# Altium PCB Carte_Batterie 2023.PcbDoc
Units mm, origin at the board's own origin, x right, y up, seen from the top; angles counter-clockwise.
Board outline 46 x 31 mm, 2 copper layers (Component Side, Solder Side), stack 1.57 mm thick; 89 components, 57 nets, 247 pads, 0 vias.
Unrouted connection lines stored in the file: 165.
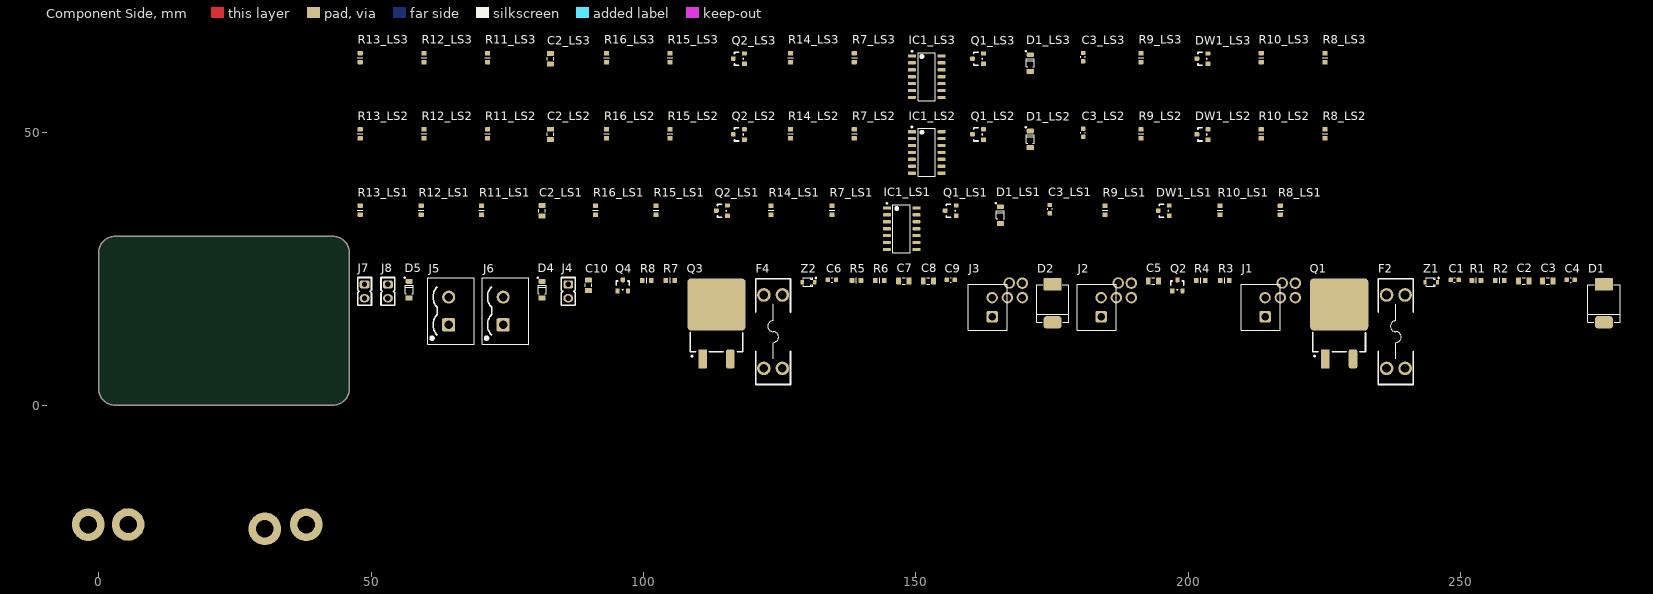
[diagram p0: Component Side view]
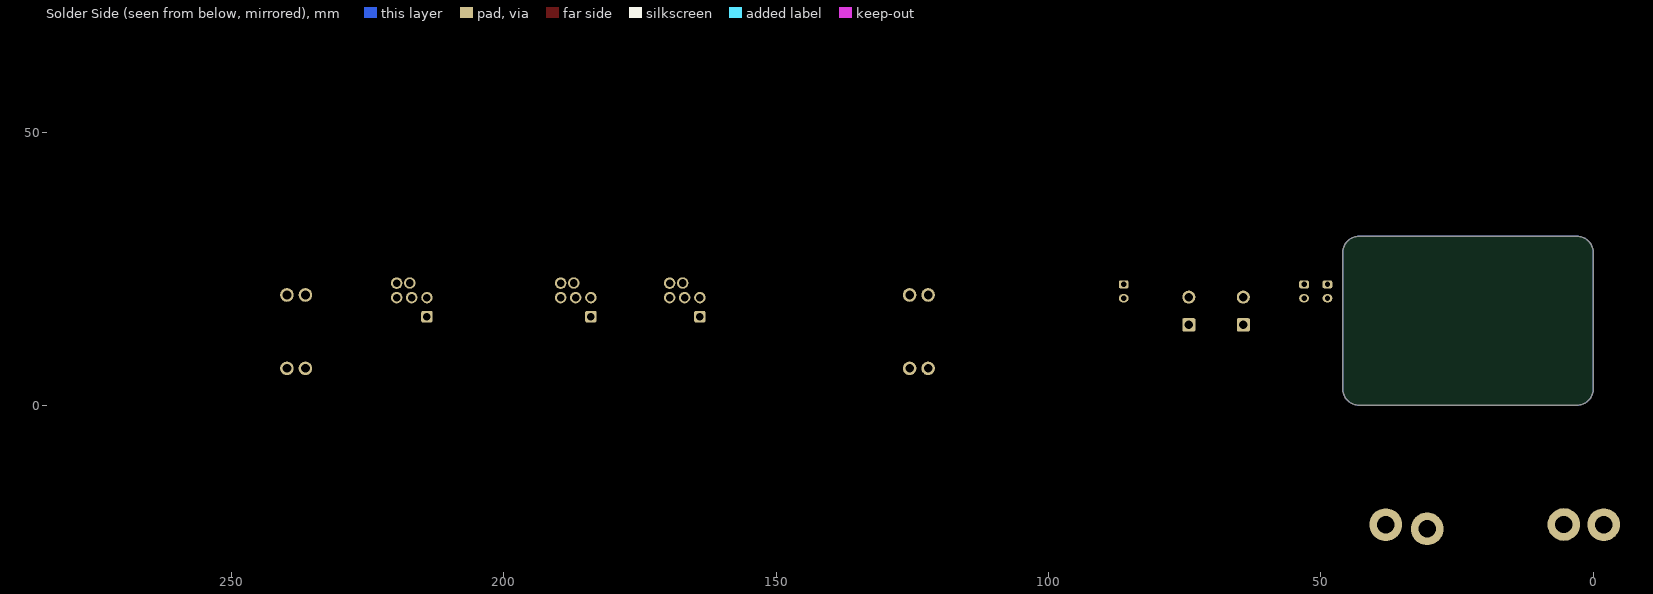
[diagram p1: Solder Side view, seen from below]

## Layer stack, top to bottom
Top Solder: solder mask 0.01, Solder Resist, Dk 3.5
Component Side: signal copper 0.035
Dielectric 1: core 1.5, FR-4, Dk 4.8
Solder Side: signal copper 0.035
Bottom Solder: solder mask 0.01, Solder Resist, Dk 3.5

## Board outline
0,3 0,28 cw(c3,28) 3,31 43,31 cw(c43,28) 46,28 46,3 cw(c43,3) 43,0 3,0 cw(c3,3)

## Design rules (kind name [scope] priority, off if disabled: settings)
AssemblyTestPointUsage [All] p1 off:
AssemblyTestpoint [All] p1 off: testpointundercomponent=TRUE minsize=1.016 maxsize=2.54 preferedsize=1.524 minholesize=0 maxholesize=1.016 preferedholesize=0.813 testpointgrid=0.025 usegrid=TRUE gridtolerance=0 allowsidetop=TRUE allowsidebottom=TRUE
BoardOutlineClearance [All] p1: gap=0.4 ignorepadtopadclearanceinfootprint=FALSE
Clearance Clearance_polygon [InPolygon] p1: gap=0.2 ignorepadtopadclearanceinfootprint=FALSE except(0: Arc-Hole Track-Hole SMDPad-Hole THPad-Hole Via-Hole Fill-Hole Poly-Hole Region-Hole Text-Hole)
Clearance Clearance_for_power_net [InNetClass('Power') vs InNet('GND')] p2: gap=0.2 ignorepadtopadclearanceinfootprint=TRUE except(0: Arc-Hole Track-Hole SMDPad-Hole THPad-Hole Via-Hole Fill-Hole Poly-Hole Region-Hole Text-Hole)
Clearance Clearance_general [All] p3: gap=0.15 ignorepadtopadclearanceinfootprint=FALSE
ComponentClearance [All] p1: gap=0 collisioncheckmode=3 verticalgap=0 showdistances=FALSE
DiffPairsRouting [All] p1 off: maxlimit=0.254 minlimit=0.127 mostfreqgap=0.254 toplayer_minwidth=0.381 toplayer_maxwidth=0.381 toplayer_prefwidth=0.381 bottomlayer_minwidth=0.381 bottomlayer_maxwidth=0.381 bottomlayer_prefwidth=0.381 maxuncoupledlength=12.7
FabricationTestPointUsage TestPointUsage [All] p1 off: valid=0 allowmultiple=FALSE
FabricationTestpoint Testpoint [All] p1 off: side=3 testpointundercomponent=TRUE minsize=1.016 maxsize=2.54 preferedsize=1.524 minholesize=0 maxholesize=1.016 preferedholesize=0.813 testpointgrid=0.025 allowsidetop=TRUE allowsidebottom=TRUE usegrid=TRUE gridtolerance=0
FanoutControl Fanout_BGA [IsBGA] p1 off: bgadir=Out bgaviamode=Centered fanoutstyle=Auto fanoutdirection=Alternating viagrid=0.025 // Fanout_BGA (Default Rule)
FanoutControl Fanout_LCC [IsLCC] p2 off: bgadir=Out bgaviamode=Centered fanoutstyle=Auto fanoutdirection=Alternating viagrid=0.025 // Fanout_LCC (Default Rule)
FanoutControl Fanout_SOIC [IsSOIC] p3 off: bgadir=Out bgaviamode=Centered fanoutstyle=Auto fanoutdirection=Alternating viagrid=0.025 // Fanout_SOIC (Default Rule)
FanoutControl Fanout_Small [(CompPinCount < 5)] p4 off: bgadir=Out bgaviamode=Centered fanoutstyle=Auto fanoutdirection=OutThenIn viagrid=0.025 // Fanout_Small (Default Rule)
FanoutControl Fanout_Default [All] p5 off: bgadir=Out bgaviamode=Centered fanoutstyle=Auto fanoutdirection=Alternating viagrid=0.025 // Fanout_Default (Default Rule)
Height [All] p1: minheight=0 maxheight=50 prefheight=10
HoleSize [All] p1: absolutevalues=TRUE maxlimit=6.3 minlimit=0.2 maxpercent=80.000 minpercent=20.000
HoleToHoleClearance [All] p1: gap=0.4 allowstackedmicrovias=TRUE
MinimumAnnularRing [All] p1: minimumring=0.076
MinimumSolderMaskSliver [All] p1: minsoldermaskwidth=0.15
MinimumSolderMaskSliver SilkscreenOverComponentPads [All] p2 off: minsoldermaskwidth=0.254
NetAntennae [All] p1 off: netantennaetolerance=0
PlaneClearance [All] p1: clearance=0.5
PlaneConnect [All] p1: planeconnectstyle=Relief reliefexpansion=0.4 reliefentries=4 reliefconductorwidth=0.3 reliefairgap=0.2
PolygonConnect [All] p1: thpad.connectstyle=Relief thpad.reliefconductorwidth=0.25 thpad.reliefentries=4 thpad.polygonreliefangle="90 Angle" thpad.airgapwidth=0.254 smdpad.connectstyle=Relief smdpad.reliefconductorwidth=0.25 smdpad.reliefentries=4 smdpad.polygonreliefangle="90 Angle" smdpad.airgapwidth=0.254 via.connectstyle=Direct via.reliefconductorwidth=0.25 via.reliefentries=4 via.polygonreliefangle="90 Angle" via.airgapwidth=0.254
PolygonConnect PolygonConnect_Via_GND [All vs (InNet('GND') AND  IsVia)] p2: thpad.connectstyle=Relief thpad.reliefconductorwidth=0.25 thpad.reliefentries=4 thpad.polygonreliefangle="90 Angle" thpad.airgapwidth=0.254 smdpad.connectstyle=Relief smdpad.reliefconductorwidth=0.25 smdpad.reliefentries=4 smdpad.polygonreliefangle="90 Angle" smdpad.airgapwidth=0.254 via.connectstyle=Direct via.reliefconductorwidth=0.25 via.reliefentries=4 via.polygonreliefangle="90 Angle" via.airgapwidth=0.254
PolygonConnect PolygonConnect_Via_Power [(InNetClass('Power')  AND  IsVia)] p3: connectstyle=Relief reliefconductorwidth=0.25 reliefentries=4 polygonreliefangle="90 Angle" airgapwidth=0.254
RoomDefinition LS3 [InComponentClass('LS3')] p1: confinementstyle=ConfineIn formatcopy=TRUE lockcomponents=FALSE outline 47.096,55.5 233.696,55.5 233.696,68.3 47.096,68.3
RoomDefinition LS2 [InComponentClass('LS2')] p2: confinementstyle=ConfineIn formatcopy=TRUE lockcomponents=FALSE outline 47.096,41.6 233.696,41.6 233.696,54.3 47.096,54.3
RoomDefinition LS1 [InComponentClass('LS1')] p3: confinementstyle=ConfineIn formatcopy=TRUE lockcomponents=FALSE outline 47.096,27.6 224.996,27.6 224.996,40.3 47.096,40.3
RoomDefinition "Carte_Batterie 2023" [InComponentClass('Carte_Batterie 2023')] p4: confinementstyle=ConfineIn formatcopy=TRUE lockcomponents=FALSE outline 47.196,1.5 279.595,1.5 279.595,26.3 47.196,26.3
RoutingCorners [All] p1: cornerstyle=45-Degree minsetback=1.5 maxsetback=2.54
RoutingVias [All] p1: holewidth=0.3 width=0.7 viastyle="Through Hole" minholewidth=0.3 minwidth=0.7 maxholewidth=0.3 maxwidth=1
SilkToSilkClearance [All] p1 off: silktosilkclearance=0.1
SolderMaskExpansion [All] p1: expansion=0.075 istentingtop=FALSE
Width [All] p1: maxlimit=15 minlimit=0.127 preferedwidth=0.2
10 further rules are at their usual default settings.

## Classes and differential pairs
channel class Lipo_Saver_Buzzer_only: LS1 LS2 LS3
net class PWR_35A: Batt12_P3 VBATT12 VBATT12_F
net class PWR_20A: Batt24_P3 Batt24_P6 VBATT24 VBATT24_F
component class LS3: C2_LS3 C3_LS3 D1_LS3 DW1_LS3 IC1_LS3 Q1_LS3 Q2_LS3 R7_LS3 R8_LS3 R9_LS3 R10_LS3 R11_LS3 R12_LS3 R13_LS3 R14_LS3 R15_LS3 R16_LS3 SPK1_LS3
component class LS2: C2_LS2 C3_LS2 D1_LS2 DW1_LS2 IC1_LS2 Q1_LS2 Q2_LS2 R7_LS2 R8_LS2 R9_LS2 R10_LS2 R11_LS2 R12_LS2 R13_LS2 R14_LS2 R15_LS2 R16_LS2 SPK1_LS2
component class LS1: C2_LS1 C3_LS1 D1_LS1 DW1_LS1 IC1_LS1 Q1_LS1 Q2_LS1 R7_LS1 R8_LS1 R9_LS1 R10_LS1 R11_LS1 R12_LS1 R13_LS1 R14_LS1 R15_LS1 R16_LS1 SPK1_LS1
component class "Carte_Batterie 2023": C1 C2 C3 C4 C5 C6 C7 C8 C9 C10 D1 D2 D4 D5 F1 F2 F3 F4 J1 J2 J3 J4 J5 J6 J7 J8 Q1 Q2 Q3 Q4 R1 R2 R3 R4 R5 R6 R7 R8 Z1 Z2

## Components (designator, comment, footprint, x,y, rotation, side; value= is the part's Value field where it differs from the comment)
C1 "100nF" "WCAP-CSGP_0603, 1.6x0.8x0.8" 248.896,23 r0 top
C2 "1uF" "WCAP-CSGP_0805, 2x1.25x1.25" 261.596,22.8 r0 top
C2_LS1 "recup_C2" "WCAP-CSGP_0805, 2x1.25x1.25" 81.396,35.7 r90 top value=10uF (schematic designator C2)
C2_LS2 "recup_C2" "WCAP-CSGP_0805, 2x1.25x1.25" 82.896,49.7 r90 top value=10uF (schematic designator C2)
C2_LS3 "recup_C2" "WCAP-CSGP_0805, 2x1.25x1.25" 82.896,63.6 r90 top value=10uF (schematic designator C2)
C3 "1uF" "WCAP-CSGP_0805, 2x1.25x1.25" 265.996,22.8 r0 top
C3_LS1 "recup_C3" "WCAP-CSGP_0603, 1.6x0.8x0.8" 174.596,36 r90 top value=10nF (schematic designator C3)
C3_LS2 "recup_C3" "WCAP-CSGP_0603, 1.6x0.8x0.8" 180.696,50 r90 top value=10nF (schematic designator C3)
C3_LS3 "recup_C3" "WCAP-CSGP_0603, 1.6x0.8x0.8" 180.696,63.9 r90 top value=10nF (schematic designator C3)
C4 "100nF" "WCAP-CSGP_0603, 1.6x0.8x0.8" 270.195,23 r0 top
C5 "10uF" "WCAP-CSGP_0805, 2x1.25x1.25" 193.596,22.8 r0 top
C6 "100nF" "WCAP-CSGP_0603, 1.6x0.8x0.8" 134.596,23 r0 top
C7 "1uF" "WCAP-CSGP_0805, 2x1.25x1.25" 147.796,22.8 r0 top
C8 "1uF" "WCAP-CSGP_0805, 2x1.25x1.25" 152.296,22.8 r0 top
C9 "100nF" "WCAP-CSGP_0603, 1.6x0.8x0.8" 156.396,23 r0 top
C10 "10uF" "WCAP-CSGP_0805, 2x1.25x1.25" 89.896,22 r90 top
D1 "RS3J R6" "SMC, DO-214AB" 276.295,18.7 r90 top value=600V
D1_LS1 "recup_D1" SOD-123FL 165.496,34.9 r90 top value=40V (schematic designator D1)
D1_LS2 "recup_D1" SOD-123FL 170.996,48.8 r90 top value=40V (schematic designator D1)
D1_LS3 "recup_D1" SOD-123FL 170.996,62.8 r90 top value=40V (schematic designator D1)
D2 "RS3J R6" "SMC, DO-214AB" 175.096,18.7 r90 top value=600V
D4 "RBR3MM40ATFTR" SOD-123FL 81.396,21.2 r90 top value=40V
D5 "RBR3MM40ATFTR" SOD-123FL 56.996,21.2 r90 top value=40V
DW1_LS1 "recup_DW1" SOT-23 195.496,35.7 r90 top (schematic designator DW1)
DW1_LS2 "recup_DW1" SOT-23 202.596,49.7 r90 top (schematic designator DW1)
DW1_LS3 "recup_DW1" SOT-23 202.596,63.6 r90 top (schematic designator DW1)
F2 "3557-2" 3557-2 238.096,13.5 r90 top value=na
F4 "3557-2" 3557-2 123.796,13.5 r90 top value=na
IC1_LS1 "ASIC_LipoSaver" SOIC127P600X175-14N 147.396,32.4 r0 top (schematic designator IC1)
IC1_LS2 "ASIC_LipoSaver" SOIC127P600X175-14N 151.996,46.4 r0 top (schematic designator IC1)
IC1_LS3 "ASIC_LipoSaver" SOIC127P600X175-14N 151.996,60.3 r0 top (schematic designator IC1)
J1 "custom connector" CONN_BATT-M12 213.296,18 r90 top
J2 "custom connector" CONN_BATT-M12 183.196,18 r90 top
J3 "custom connector" CONN_BATT-M12 163.196,18 r90 top
J4 "22-03-2021" Conn_22-03-2021 86.196,20.9 r90 top
J5 "691311500102" 691311500102 64.696,17.3 r90 top value=2
J6 "691311500102" 691311500102 74.696,17.3 r90 top value=2
J7 "22-03-2021" Conn_22-03-2021 48.796,20.9 r90 top
J8 "22-03-2021" Conn_22-03-2021 53.096,20.9 r90 top
Q1 "SQM120P06-07L_GE3" "TO263AB, D2PAK" 227.696,13.5 r0 top
Q1_LS1 "recup_T1" SOT-23 156.396,35.7 r90 top (schematic designator Q1)
Q1_LS2 "recup_T1" SOT-23 161.396,49.7 r90 top (schematic designator Q1)
Q1_LS3 "recup_T1" SOT-23 161.396,63.6 r90 top (schematic designator Q1)
Q2 "2N7002" SOT-23 197.996,22 r0 top
Q2_LS1 "recup_T2" SOT-23 114.396,35.7 r90 top (schematic designator Q2)
Q2_LS2 "recup_T2" SOT-23 117.496,49.7 r90 top (schematic designator Q2)
Q2_LS3 "recup_T2" SOT-23 117.496,63.6 r90 top (schematic designator Q2)
Q3 "SQM120P06-07L_GE3" "TO263AB, D2PAK" 113.396,13.5 r0 top
Q4 "2N7002" SOT-23 96.196,22 r0 top
R1 "RC0603FR-0710KL" RESC1608X06N 252.896,22.9 r0 top value=10k
R2 "RC0603FR-07100KL" RESC1608X06N 257.196,22.9 r0 top value=100k
R3 "RC0603FR-07100KL" RESC1608X06N 206.696,22.9 r0 top value=100k
R4 "RC0603FR-071K8L" RESC1608X06N 202.296,22.9 r0 top value=1.8k
R5 "RC0603FR-07100KL" RESC1608X06N 139.096,22.9 r0 top value=100k
R6 "RC0603FR-07100KL" RESC1608X06N 143.396,22.9 r0 top value=100k
R7 "RC0603FR-0710KL" RESC1608X06N 104.896,22.9 r0 top value=10k
R7_LS1 "RC0603FR-07100KL" RESC1608X06N 134.596,35.8 r90 top value=510 (schematic designator R7)
R7_LS2 "RC0603FR-07100KL" RESC1608X06N 138.696,49.8 r90 top value=510 (schematic designator R7)
R7_LS3 "RC0603FR-07100KL" RESC1608X06N 138.696,63.8 r90 top value=510 (schematic designator R7)
R8 "RC0603FR-07100KL" RESC1608X06N 100.596,22.9 r0 top value=100k
R8_LS1 "RC0603FR-07100KL" RESC1608X06N 216.896,35.8 r90 top value=1.5k (schematic designator R8)
R8_LS2 "RC0603FR-07100KL" RESC1608X06N 225.096,49.8 r90 top value=1.5k (schematic designator R8)
R8_LS3 "RC0603FR-07100KL" RESC1608X06N 225.096,63.8 r90 top value=1.5k (schematic designator R8)
R9_LS1 "RC0603FR-07100KL" RESC1608X06N 184.696,35.8 r90 top value=12k (schematic designator R9)
R9_LS2 "RC0603FR-07100KL" RESC1608X06N 191.296,49.8 r90 top value=12k (schematic designator R9)
R9_LS3 "RC0603FR-07100KL" RESC1608X06N 191.296,63.8 r90 top value=12k (schematic designator R9)
R10_LS1 "RC0603FR-07100KL" RESC1608X06N 205.796,35.8 r90 top value=12k (schematic designator R10)
R10_LS2 "RC0603FR-07100KL" RESC1608X06N 213.396,49.8 r90 top value=12k (schematic designator R10)
R10_LS3 "RC0603FR-07100KL" RESC1608X06N 213.396,63.8 r90 top value=12k (schematic designator R10)
R11_LS1 "RC0603FR-07100KL" RESC1608X06N 70.296,35.8 r90 top value=12k (schematic designator R11)
R11_LS2 "RC0603FR-07100KL" RESC1608X06N 71.396,49.8 r90 top value=12k (schematic designator R11)
R11_LS3 "RC0603FR-07100KL" RESC1608X06N 71.396,63.8 r90 top value=12k (schematic designator R11)
R12_LS1 "RC0603FR-07100KL" RESC1608X06N 59.196,35.8 r90 top value=12k (schematic designator R12)
R12_LS2 "RC0603FR-07100KL" RESC1608X06N 59.696,49.8 r90 top value=12k (schematic designator R12)
R12_LS3 "RC0603FR-07100KL" RESC1608X06N 59.696,63.8 r90 top value=12k (schematic designator R12)
R13_LS1 "RC0603FR-07100KL" RESC1608X06N 47.996,35.8 r90 top value=12k (schematic designator R13)
R13_LS2 "RC0603FR-07100KL" RESC1608X06N 47.996,49.8 r90 top value=12k (schematic designator R13)
R13_LS3 "RC0603FR-07100KL" RESC1608X06N 47.996,63.8 r90 top value=12k (schematic designator R13)
R14_LS1 "RC0603FR-07100KL" RESC1608X06N 123.396,35.8 r90 top value=24k (schematic designator R14)
R14_LS2 "RC0603FR-07100KL" RESC1608X06N 126.996,49.8 r90 top value=24k (schematic designator R14)
R14_LS3 "RC0603FR-07100KL" RESC1608X06N 126.996,63.8 r90 top value=24k (schematic designator R14)
R15_LS1 "RC0603FR-07100KL" RESC1608X06N 102.296,35.8 r90 top value=24k (schematic designator R15)
R15_LS2 "RC0603FR-07100KL" RESC1608X06N 104.896,49.8 r90 top value=24k (schematic designator R15)
R15_LS3 "RC0603FR-07100KL" RESC1608X06N 104.896,63.8 r90 top value=24k (schematic designator R15)
R16_LS1 "RC0603FR-07100KL" RESC1608X06N 91.196,35.8 r90 top value=24k (schematic designator R16)
R16_LS2 "RC0603FR-07100KL" RESC1608X06N 93.196,49.8 r90 top value=24k (schematic designator R16)
R16_LS3 "RC0603FR-07100KL" RESC1608X06N 93.196,63.8 r90 top value=24k (schematic designator R16)
Z1 "MM3Z15VST1G" SOD-323 244.596,22.6 r0 top value=14.6V
Z2 "MM3Z15VST1G" SOD-323 130.296,22.6 r0 top value=14.6V

## Footprints (in the part's own frame and the unit in brackets; to place one, negate y for a bottom-side part, rotate by r counter-clockwise, add the part's x,y. Pads: shape width x height; smd on the part's side, far side on the other; paste and mask are expansions set on the pad)
3557-2 [mm] "Fuse holder"
  round 2.5 hole 1.6: 1(-6.735,1.7) 2(6.735,1.7) 3(-6.735,-1.7) 4(6.735,-1.7)
  silkscreen extent -9.7,-3.2 9.7,3.2, body extent -9.91,-3.38 9.91,3.36, height 7.39
691311500102 [mm] "5,08mm - PCB Headers - Vertical - Closed ends -02p"
  rrect20% 2.4x2.4 hole 1.6: 1(-2.54,0.45)
  round 2.4 hole 1.6: 2(2.54,0.45)
  silkscreen extent -6.08,-4.25 6.08,4.25, body extent -6.08,-4.25 6.08,4.25, height 12.05
Conn_22-03-2021 [mm]
  rrect50% 1.5x1.8 hole 1: 1(1.27,0)
  oval 1.5x1.8 hole 1: 2(-1.27,0)
  silkscreen extent -2.54,-1.27 2.54,1.27, body extent -2.54,-1.27 2.54,1.27, height 11.6
CONN_BATT-M12 [mm] "Batterie connector for Milwaukee M12, use 2x RS 125-2006 and 3x RS 125-2000"
  rrect30% 2.1x2.1 hole 1.4: 1(-1.75,-0.8)
  round 2.1 hole 1.4: 2(1.75,-0.8) 3(1.75,-3.6) 4(1.75,-6.35) 5(4.4,-6.35) 5(4.425,-3.95)
  silkscreen extent -4.2,-3.6 4.2,3.6, body extent -16.27,-3.62 -7.88,3.57, height 9.3
RESC1608X06N [mm] "Chip Resistor, 2-Leads, Body 1,6x0,8mm, IPC Medium Density"
  rrect30% 0.85x0.95 smd: 1(-0.825,0) 2(0.825,0)
  silkscreen extent 0,-0.5 0,0.5, body extent -0.78,-0.43 0.78,0.43, height 0.45
"SMC, DO-214AB" [mm] "WE-TVSP Power TVS Diode, DO-214AB, Unidirectional"
  rrect15% 2.3x3.3 smd: 1(3.5,0)
  rrect50% 2.3x3.3 smd: 2(-3.5,0)
  silkscreen extent -3.43,-2.95 3.43,2.95, body extent -3.97,-2.95 3.97,2.95, height 2.5
SOD-123FL [mm] "SOD-123FL"
  rrect15% 0.9x1.3 smd: 1(-1.525,0)
  rrect50% 0.9x1.3 smd: 2(1.525,0)
  silkscreen extent -0.7,-0.75 2.3,0.9, body extent -1.8,-0.83 1.8,0.82, height 0.95
SOD-323 [mm] "SOD-323/SC-76; 2 Leads; Body 1.7 x 1.3 mm, (LxW)"
  rrect15% 0.63x0.83 smd: 1(-1.15,0)
  rrect50% 0.63x0.83 smd: 2(1.15,0)
  silkscreen extent -0.95,-0.75 1.45,0.85, body extent -1.35,-0.63 1.35,0.62, height 1.1
SOIC127P600X175-14N [mm] "SOIC, 14-Leads, Body 8,62x3,90mm, Pitch 1,27mm, IPC Medium Density"
  rrect15% 1.45x0.6 smd: 1(-2.725,3.81)
  rrect50% 1.45x0.6 smd: 2(-2.725,2.54) 3(-2.725,1.27) 4(-2.725,0) 5(-2.725,-1.27) 6(-2.725,-2.54) 7(-2.725,-3.81) 8(2.725,-3.81) 9(2.725,-2.54) 10(2.725,-1.27) 11(2.725,0) 12(2.725,1.27) 13(2.725,2.54) 14(2.725,3.81)
  silkscreen extent -2.85,-4.41 1.6,4.78, body extent -3,-4.44 3,4.45, height 1.7
SOT-23 [mm]
  rrect15% 0.8x0.9 smd: 1(-0.953,-1.016)
  rrect50% 0.8x0.9 smd: 2(0.953,-1.016) 3(0.013,1.016)
  silkscreen extent -1.2,-0.8 1.2,0.8, body extent -1.5,-1.13 1.5,1.13, height 1.22
"TO263AB, D2PAK" [mm]
  rrect15% 1.6x3.5 smd: 1(-2.54,-5)
  rrect50% 1.6x3.5 smd: 3(2.54,-5)
  rrect15% 10.7x9.6 smd: 4(0,5)
  silkscreen extent -4.83,-4.62 4.83,-0.1, body extent -5.05,-6.64 4.95,9.25, height 4.3
"WCAP-CSGP_0603, 1.6x0.8x0.8" [mm] "WCAP-CSGP Ceramic Capacitors, size 0603, body 1.6x0.8x0.8"
  rrect30% 0.8x0.8 smd: 1(-0.75,0) 2(0.75,0)
  silkscreen extent -0.13,-0.4 0.13,0.4, body extent -1,-0.39 1,0.39, height 0.8
"WCAP-CSGP_0805, 2x1.25x1.25" [mm] "WCAP-CSGP Ceramic Capacitors, size 0805, body 2x1.25x1.25"
  rrect30% 0.9x1.3 smd: 1(-0.95,0) 2(0.95,0)
  silkscreen extent -0.28,-0.6 0.28,0.6, body extent -1,-0.63 1,0.62, height 1.25

## Part data
C1 C3_LS1 C3_LS2 C3_LS3 C4 C6 C9: library part "WCAP-CSGP, 885012206095", "CAP CER 100nF 50V X7R 0603", Manufacturer="Wurth Elektronik", Manufacturer Part Number=885012206095, RatedVoltage=50V, CeramicType=X7R, ComponentLink1Description=Datasheet, ComponentLink1URL=http://katalog.we-online.com/pbs/datasheet/885012206095.pdf, Size=0603, SUPPLIER 2=JLCPCB, Supplier Footprint 2=0603, SUPPLIER PART NUMBER 2=C14663
C2 C3 C7 C8: library part "WCAP-CSGP, 885012207103", "CAP CER 1uF 50V X7R 0805", Manufacturer="Wurth Elektronik", Manufacturer Part Number=885012207103, RatedVoltage=50V, CeramicType=X7R, ComponentLink1Description=Datasheet, ComponentLink1URL=http://katalog.we-online.com/pbs/datasheet/885012207103.pdf, Size=0805, SUPPLIER 2=JLCPCB, Supplier Footprint 2=0805, SUPPLIER PART NUMBER 2=C28323
C2_LS1 C2_LS2 C2_LS3: library part "WCAP-CSGP, 885012207103", "CAP CER 1uF 50V X7R 0805", Manufacturer="Wurth Elektronik", Manufacturer Part Number=885012207103, RatedVoltage=50V, SUPPLIER PART NUMBER 1=2495200, CeramicType=X7R, ComponentLink1Description=Datasheet, ComponentLink1URL=http://katalog.we-online.com/pbs/datasheet/885012207103.pdf, Size=0805, SUPPLIER 1=Farnell, SUPPLIER 2=JLCPCB, Supplier Footprint 2=0805, SUPPLIER PART NUMBER 2=C28323
C5 C10: library part "WCAP-CSGP, 885012207026", "CAP CER 10uF 10V X7R 0805", Manufacturer="Wurth Elektronik", Manufacturer Part Number=885012207026, RatedVoltage=10V, SUPPLIER PART NUMBER 1=2495189, CeramicType=X7R, ComponentLink1Description=Datasheet, ComponentLink1URL=http://katalog.we-online.com/pbs/datasheet/885012207026.pdf, Size=0805, SUPPLIER 1=Farnell, SUPPLIER 2=JLCPCB, Supplier Footprint 2=0805, SUPPLIER PART NUMBER 2=C15850
D1 D2: library part RS3J_R6, "DIODE GEN PURP 600V 3A SMC", ContinuousForwardCurrent=3A, Manufacturer="TAIWAN SEMICONDUCTOR", SUPPLIER PART NUMBER 1=2677388, ComponentLink1Description=Datasheet, ComponentLink1URL=http://www.farnell.com/datasheets/2182655.pdf, Manufacturer Part Number="RS3J R6", SUPPLIER 1=Farnell, Type=Standard
D1_LS1 D1_LS2 D1_LS3: library part RBR3MM40ATFTR, "DIODE SCHOTTKY 40V 3A SOD123-FL", ContinuousForwardCurrent=3A, Manufacturer=ROHM, SUPPLIER PART NUMBER 1=2581593, ComponentLink1Description=Datasheet, ComponentLink1URL=http://www.farnell.com/datasheets/2067190.pdf, ComponentLink2Description=Manufacturer, ComponentLink2URL=http://www.rohm.com/web/global/products/-/product/RBR3MM40ATF, Manufacturer Part Number=RBR3MM40ATFTR, SUPPLIER 1=Farnell, SUPPLIER 2=JLCPCB, Supplier Footprint 2=SOD-123, SUPPLIER PART NUMBER 2=C8598, Type=Schottky
D4 D5: "DIODE SCHOTTKY 40V 3A SOD123-FL", ContinuousForwardCurrent=3A, Manufacturer=ROHM, SUPPLIER PART NUMBER 1=2581593, ComponentLink1Description=Datasheet, ComponentLink1URL=http://www.farnell.com/datasheets/2067190.pdf, ComponentLink2Description=Manufacturer, ComponentLink2URL=http://www.rohm.com/web/global/products/-/product/RBR3MM40ATF, Manufacturer Part Number=RBR3MM40ATFTR, SUPPLIER 1=Farnell, SUPPLIER 2=JLCPCB, Supplier Footprint 2=SOD-123, SUPPLIER PART NUMBER 2=C8598, Type=Schottky
DW1_LS1 DW1_LS2 DW1_LS3 Q1_LS1 Q1_LS2 Q1_LS3 Q2_LS1 Q2_LS2 Q2_LS3: library part 2N7002, "MOSFET N 60V 115MA SOT23", Manufacturer="Changjiang Electronics Tech (CJ)", SUPPLIER PART NUMBER 1=1510761, ComponentLink1Description=Datasheet, ComponentLink1URL=https://datasheet.lcsc.com/szlcsc/1810151612_Changjiang-Electronics-Tech-CJ-2N7002_C8545.pdf, Manufacturer Part Number=2N7002, SUPPLIER 1=Farnell, SUPPLIER 2=JLCPCB, Supplier Footprint 2=SOT-23-3, SUPPLIER PART NUMBER 2=C8545
F2 F4: "FUSE Holder 500V 30A PCB", Manufacturer="Keystone Electronics", SUPPLIER PART NUMBER 1=2292904, ComponentLink1Description=Datasheet, ComponentLink1URL=http://www.keyelco.com/product-pdf.cfm?p=296, Manufacturer Part Number=3557-2, SUPPLIER 1=Farnell
IC1_LS1 IC1_LS2 IC1_LS3: "Specific IC for Lipo Saver (extracted", Manufacturer=LipoSaver, ComponentLink1Description=Datasheet, ComponentLink1URL=https://www.onsemi.com/pdf/datasheet/74vhc02-d.pdf, Manufacturer Part Number=ASIC_LipoSaver
J1 J2 J3: library part CONN_BATT-M12, "Batterie connector for Milwaukee M12, use 2x RS 125-2006 and 3x RS 125-2000"
J4 J7 J8: "CONN HEADER VERT 2POS 2.54MM", Manufacturer=MOLEX, SUPPLIER PART NUMBER 1=9731075, ComponentLink1Description=Datasheet, ComponentLink1URL=http://www.farnell.com/datasheets/1791308.pdf, ComponentLink2Description=Drawings, ComponentLink2URL="http://www.farnell.com/cad/495071.pdf  http://www.farnell.com/cad/1533907.pdf  http://www.farnell.com/cad/1533907.pdf", Manufacturer Part Number=22-03-2021, SUPPLIER 1=Farnell
J5 J6: "WR-TBL 2p Series 311 - 5.08 mm Closed Vertical PCB Header", Manufacturer="Wurth Electronics Inc.", SUPPLIER PART NUMBER 1=1641978, ComponentLink1Description=Datasheet, ComponentLink1URL=https://katalog.we-online.de/em/datasheet/6913115001xx.pdf, Manufacturer Part Number=691311500102, SUPPLIER 1=Farnell
Q1 Q3: "MOSFET P 60V 120A D2PAK", Manufacturer=VISHAY, SUPPLIER PART NUMBER 1=2617099, ComponentLink1Description=Datasheet, ComponentLink1URL=http://www.vishay.com/docs/67026/sqm120p0.pdf, Manufacturer Part Number=SQM120P06-07L_GE3, SUPPLIER 1=Farnell
Q2 Q4: "MOSFET N 60V 115MA SOT23", Manufacturer="Changjiang Electronics Tech (CJ)", SUPPLIER PART NUMBER 1=1510761, ComponentLink1Description=Datasheet, ComponentLink1URL=https://datasheet.lcsc.com/szlcsc/1810151612_Changjiang-Electronics-Tech-CJ-2N7002_C8545.pdf, Manufacturer Part Number=2N7002, SUPPLIER 1=Farnell, SUPPLIER 2=JLCPCB, Supplier Footprint 2=SOT-23-3, SUPPLIER PART NUMBER 2=C8545
R1 R7: "RES SMD 10K OHM 1% 1/10W 0603", Manufacturer=Yageo, POWER=100mW, SUPPLIER PART NUMBER 1=9238603, ComponentLink1Description=Manufacturer, ComponentLink1URL=http://www.yageo.com/NewPortal/_en/index.jsp, ComponentLink2Description=Datasheet, ComponentLink2URL=http://www.farnell.com/datasheets/2167052.pdf, Manufacturer Part Number=RC0603FR-0710KL, Precision=±1%, SUPPLIER 1=Farnell, SUPPLIER 2=JLCPCB, Supplier Footprint 2=0603, SUPPLIER PART NUMBER 2=C25804, Type="Thick Film", Vmax=50V
R2 R3 R5 R6 R7_LS1 R7_LS2 R7_LS3 R8 R8_LS1 R8_LS2 R8_LS3 R9_LS1 R9_LS2 R9_LS3 R10_LS1 R10_LS2 R10_LS3 R11_LS1 R11_LS2 R11_LS3 R12_LS1 R12_LS2 R12_LS3 R13_LS1 R13_LS2 R13_LS3 R14_LS1 R14_LS2 R14_LS3 R15_LS1 R15_LS2 R15_LS3 R16_LS1 R16_LS2 R16_LS3: "RES SMD 100K OHM 1% 1/10W 0603", Manufacturer=Yageo, POWER=100mW, SUPPLIER PART NUMBER 1=2309107, ComponentLink1Description=Manufacturer, ComponentLink1URL=http://www.yageo.com/NewPortal/_en/index.jsp, ComponentLink2Description=Datasheet, ComponentLink2URL=http://www.farnell.com/datasheets/2167052.pdf, Manufacturer Part Number=RC0603FR-07100KL, Precision=±1%, SUPPLIER 1=Farnell, SUPPLIER 2=JLCPCB, Supplier Footprint 2=0603, SUPPLIER PART NUMBER 2=C25803, Type="Thick Film", Vmax=50V
R4: "RES SMD 1.8K OHM 1% 1/10W 0603", Manufacturer=Yageo, POWER=100mW, SUPPLIER PART NUMBER 1=9238514, ComponentLink1Description=Manufacturer, ComponentLink1URL=http://www.yageo.com/NewPortal/_en/index.jsp, ComponentLink2Description=Datasheet, ComponentLink2URL=http://www.farnell.com/datasheets/2167052.pdf, Manufacturer Part Number=RC0603FR-071K8L, Precision=±1%, SUPPLIER 1=Farnell, SUPPLIER 2=JLCPCB, Supplier Footprint 2=0603, SUPPLIER PART NUMBER 2=C4177, Type="Thick Film", Vmax=50V
Z1 Z2: "DIODE ZENER 14.6V 300mW SOD323", Manufacturer="ON Semiconductor", SUPPLIER PART NUMBER 1=2533369, ComponentLink1Description=Datasheet, ComponentLink1URL=http://www.farnell.com/datasheets/2028649.pdf, Manufacturer Part Number=MM3Z15VST1G, SUPPLIER 1=Farnell, Type=Zener

## Free pads (board coordinates)
  round 6 hole 3.2: 0(-1.9,-21.925) 0(5.4,-21.9) 0(30.5,-22.7) 0(38.1,-21.925)

## Nets (pads, with @x,y where several pads share a name; then routed paths per layer and width w, separated by ;. In a path a pad name is that pad's centre, name@x,y a point inside that pad or via, vN(x,y) a via of type N, cw(c..) or ccw(c..) an arc to the next point about the centre after c; other vN are vias at no path point)
"Alim IC_LS1": C2_LS1.2 IC1_LS1.9 IC1_LS1.10 Q1_LS1.2 R10_LS1.2
"Alim IC_LS2": C2_LS2.2 IC1_LS2.9 IC1_LS2.10 Q1_LS2.2 R10_LS2.2
"Alim IC_LS3": C2_LS3.2 IC1_LS3.9 IC1_LS3.10 Q1_LS3.2 R10_LS3.2
Batt12_P1: J3.3 R16_LS3.2
Batt12_P2: D1_LS3.1 J3.2 R15_LS3.2
Batt12_P3: F4.1 F4.3 J3.1 R14_LS3.2
Batt12_T: J3.4
Batt24_P1: J2.3 R16_LS2.2
Batt24_P2: D1_LS2.1 J2.2 R15_LS2.2
Batt24_P3: C2_LS1.1 DW1_LS1.3 IC1_LS1.7 J1.5 J2.1 Q2_LS1.2 R9_LS1.2 R11_LS1.1 R12_LS1.1 R13_LS1.1 R14_LS2.2
Batt24_P4: J1.3 R16_LS1.2
Batt24_P5: D1_LS1.1 J1.2 R15_LS1.2
Batt24_P6: F2.1 F2.3 J1.1 R14_LS1.2
Batt24_T1: J1.4
Batt24_T2: J2.4
GND: C1.1 C2_LS2.1 C2_LS3.1 C3.1 C4.1 C5.1 C6.1 C8.1 C9.1 C10.1 DW1_LS2.3 DW1_LS3.3 IC1_LS2.7 IC1_LS3.7 J2.5 J3.5 J4.2 J5.2 J6.2 J7.2 J8.2 Q2.2 Q2_LS2.2 Q2_LS3.2 Q4.2 R4.1 R8.1 R9_LS2.2 R9_LS3.2 R11_LS2.1 R11_LS3.1 R12_LS2.1 R12_LS3.1 R13_LS2.1 R13_LS3.1
NetC2_1: C2.1 Q1.1 R2.1 R3.1 Z1.1
NetC3_LS1_1: C3_LS1.1 Q1_LS1.1
NetC3_LS1_2: C3_LS1.2 DW1_LS1.1 R9_LS1.1 R10_LS1.1
NetC3_LS2_1: C3_LS2.1 Q1_LS2.1
NetC3_LS2_2: C3_LS2.2 DW1_LS2.1 R9_LS2.1 R10_LS2.1
NetC3_LS3_1: C3_LS3.1 Q1_LS3.1
NetC3_LS3_2: C3_LS3.2 DW1_LS3.1 R9_LS3.1 R10_LS3.1
NetC7_1: C7.1 Q3.1 R6.1 R7.2 Z2.1
NetD1_LS1_2: D1_LS1.2 Q1_LS1.3 R8_LS1.1
NetD1_LS2_2: D1_LS2.2 Q1_LS2.3 R8_LS2.1
NetD1_LS3_2: D1_LS3.2 Q1_LS3.3 R8_LS3.1
NetD4_2: D4.2 D5.2 J4.1
NetDW1_LS1_2: DW1_LS1.2 R8_LS1.2
NetDW1_LS2_2: DW1_LS2.2 R8_LS2.2
NetDW1_LS3_2: DW1_LS3.2 R8_LS3.2
NetIC1_LS1_4: IC1_LS1.4 R13_LS1.2 R16_LS1.1
NetIC1_LS1_5: IC1_LS1.5 R12_LS1.2 R15_LS1.1
NetIC1_LS1_6: IC1_LS1.6 R11_LS1.2 R14_LS1.1
NetIC1_LS2_4: IC1_LS2.4 R13_LS2.2 R16_LS2.1
NetIC1_LS2_5: IC1_LS2.5 R12_LS2.2 R15_LS2.1
NetIC1_LS2_6: IC1_LS2.6 R11_LS2.2 R14_LS2.1
NetIC1_LS3_4: IC1_LS3.4 R13_LS3.2 R16_LS3.1
NetIC1_LS3_5: IC1_LS3.5 R12_LS3.2 R15_LS3.1
NetIC1_LS3_6: IC1_LS3.6 R11_LS3.2 R14_LS3.1
NetQ2_3: Q2.3 R3.2
NetQ2_LS1_1: Q2_LS1.1 R7_LS1.2
NetQ2_LS1_3: Q2_LS1.3
NetQ2_LS2_1: Q2_LS2.1 R7_LS2.2
NetQ2_LS2_3: Q2_LS2.3
NetQ2_LS3_1: Q2_LS3.1 R7_LS3.2
NetQ2_LS3_3: Q2_LS3.3
NetQ4_3: Q4.3 R7.1
PWM_SPK_LS1: IC1_LS1.8 R7_LS1.1
PWM_SPK_LS2: IC1_LS2.8 R7_LS2.1
PWM_SPK_LS3: IC1_LS3.8 R7_LS3.1
SW_BATT12: C10.2 D5.1 Q4.1 R5.1 R8.2
SW_BATT24: C5.2 D4.1 Q2.1 R1.1 R4.2
VBATT12: C8.2 C9.2 D2.1 J6.1 Q3.4
VBATT12_F: C6.2 C7.2 D2.2 F4.2 F4.4 J8.1 Q3.3 R5.2 R6.2 Z2.2
VBATT24: C3.2 C4.2 D1.1 J5.1 Q1.4
VBATT24_F: C1.2 C2.2 D1.2 F2.2 F2.4 J7.1 Q1.3 R1.2 R2.2 Z1.2
pads on no net: IC1_LS1.1 IC1_LS1.2 IC1_LS1.3 IC1_LS1.11 IC1_LS1.12 IC1_LS1.13 IC1_LS1.14 IC1_LS2.1 IC1_LS2.2 IC1_LS2.3 IC1_LS2.11 IC1_LS2.12 IC1_LS2.13 IC1_LS2.14 IC1_LS3.1 IC1_LS3.2 IC1_LS3.3 IC1_LS3.11 IC1_LS3.12 IC1_LS3.13 IC1_LS3.14

## Polygon pours and split planes (outlines as drawn)
GND on Solder Side "NONET_L-01_P-001" (solid, shelved, pour order 2): 0,3 0,28 cw(c3,28) 3,31 43,31 cw(c43,28) 46,28 46,3 cw(c43,3) 43,0 3,0 cw(c3,3)
GND on Component Side "NONET_L-01_P-001" (solid, shelved, pour order 3): 0,3 0,28 cw(c3,28) 3,31 43,31 cw(c43,28) 46,28 46,3 cw(c43,3) 43,0 3,0 cw(c3,3)

## Silkscreen, mask and mechanical layers (free items; w line width, h text height)
Top Overlay:
  text "So much... Lithium" at -30.5,-10.679 h2
  text "-" at -30.5,-18.654 h1.8 r180
  text "+" at -30.5,-23.436 h1.8
  text "Capteur" at -23.4,-24.68 h1.8
Bottom Overlay:
  drawing of 50 lines, arcs and shapes, not listed
  text "Carte Batterie 2023" at -16.7,-6.7 h2.5
  text "Goldorak - Audran" at -17.1,-8.5 h2.2
Board Outline:
  the board outline again, w0.1
Top Construction:
  lines w0.1: 3,25 -0.5,25 -0.5,13.5 5.5,13.5 5.5,5.5 ; 3.493,25.041 ccw(c3,28) 5.572,29.543 ; 5.343,4.874 cw(c3,3) 5.757,1.818 ; 6,1.5 40,1.5 ; 6,29.5 40,29.5 ; 40.167,29.152 ccw(c42.924,27.97) 44.83,25.653 ; 40.428,1.457 cw(c43,3) 45.121,5.121 ; 45.5,6 45.5,24
  text "repere grossier, pas de traversant en dehors" at 13.754,-2.238 h1.52

## Dimensions
3,31 to 3,0 on Dimension
0,3 to 46,3 on Dimension